# Altium PCB VCO.PcbDoc (part 2 of 2)
Units mm, origin at the board's own origin, x right, y up, seen from the top; angles counter-clockwise.
Board outline 69 x 110 mm, 2 copper layers (Top Layer, Bottom Layer); 139 components, 108 nets, 464 pads, 459 vias.
Unrouted connection lines stored in the file: 58.
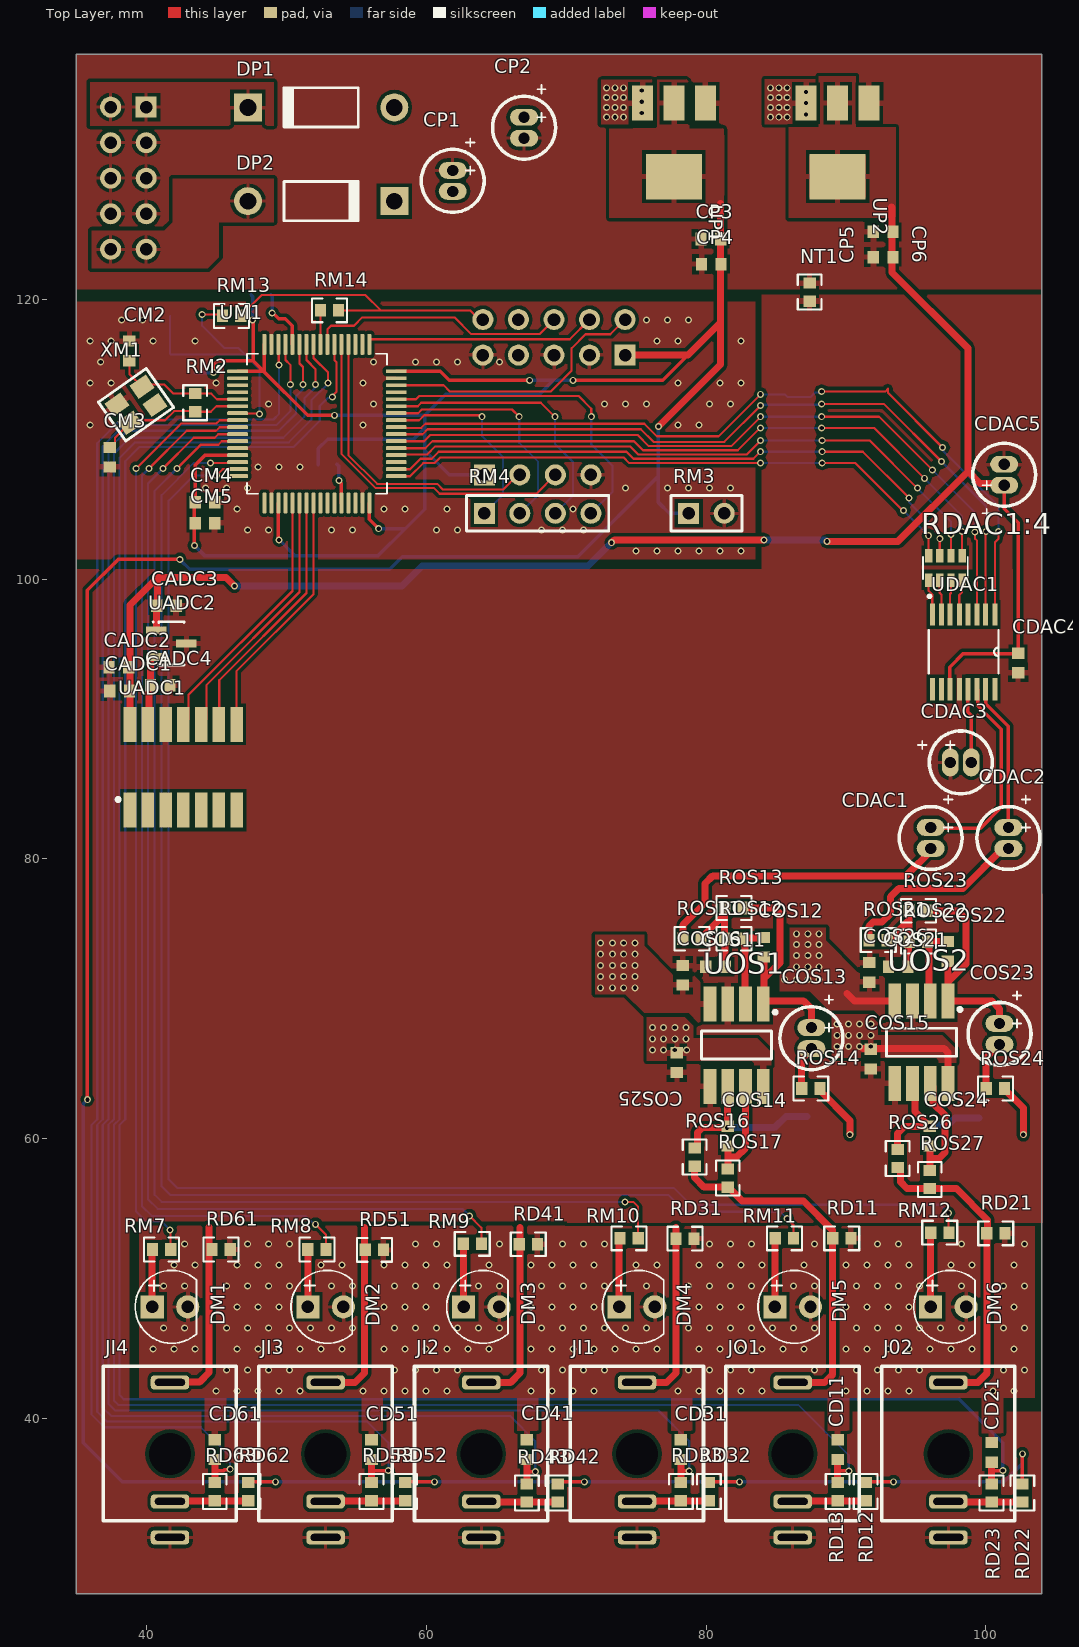
[diagram p0: Top Layer view]

## Polygon pours and split planes (outlines as drawn) (continued)
+12 on Top Layer "+12_L01_P039" (solid, pour order 39): 96.64,62.7 97.869,62.7 97.869,66.4 96.869,67.4 92.269,67.4 92.269,68.3 91.669,68.9 88.969,68.9 88.969,65.8 96.469,65.8 96.469,65.771 96.64,65.6
AGND on Top Layer "AGND_L01_P031" (solid, pour order 31): 38.8,40.5 38.8,59.2 35,59.2 35,40.5
AGND on Top Layer "AGND_L01_P099" (solid, pour order 99): 104,27.5 104,40.5 35,40.5 35,27.5
NetDP2_1 on Top Layer "NETDP2_1_L01_P023" (solid, pour order 23): 36.1,124.9 41.3,124.9 41.9,125.5 41.9,128.6 49.1,128.6 49.1,125.5 45.2,125.5 45.2,123 44.4,122.2 36.1,122.2
NetDP1_2 on Top Layer "NETDP1_2_L01_P022" (solid, pour order 22): 36,135.5 36,132.4 49.1,132.4 49.1,135.5

## Silkscreen, mask and mechanical layers (free items; w line width, h text height)
Mechanical 1:
  lines w0.127: 34.9,37.5 41.7,37.5 ; 41.7,27.5 41.7,37.5 ; 41.7,48 41.7,37.5 ; 52.823,48 52.823,37.5 ; 63.946,48 63.946,37.5 ; 75.069,48 75.069,37.5 ; 86.192,48 86.192,37.5 ; 97.315,48 97.315,37.5 ; 104.115,37.5 97.315,37.5 ; 41.7,37.5 52.823,37.5 ; 52.823,37.5 63.946,37.5 ; 63.946,37.5 75.069,37.5 ; 75.069,37.5 86.192,37.5 ; 86.192,37.5 97.315,37.5
  lines w0.254: 35,27.5 104,27.5 104,137.5 35,137.5 35,27.5

## Text inside footprints (layer, text, board x,y; h text height)
PM1: Bottom Overlay "10" at 62.533,118.032 h1.27; Bottom Overlay "9" at 62.533,115.492 h1.27; Bottom Overlay "1" at 76.249,115.492 h1.27; Bottom Overlay "2" at 76.757,118.032 h1.27
PP1: Bottom Overlay "+12" at 44.5,133.22 h1